# Altium PCB Copy of PCB.PcbDoc
Units mm, origin at the board's own origin, x right, y up, seen from the top; angles counter-clockwise.
Board outline 70 x 50 mm, 2 copper layers (Top Layer, Bottom Layer); 47 components, 41 nets, 168 pads, 0 vias.
Unrouted connection lines stored in the file: 29.
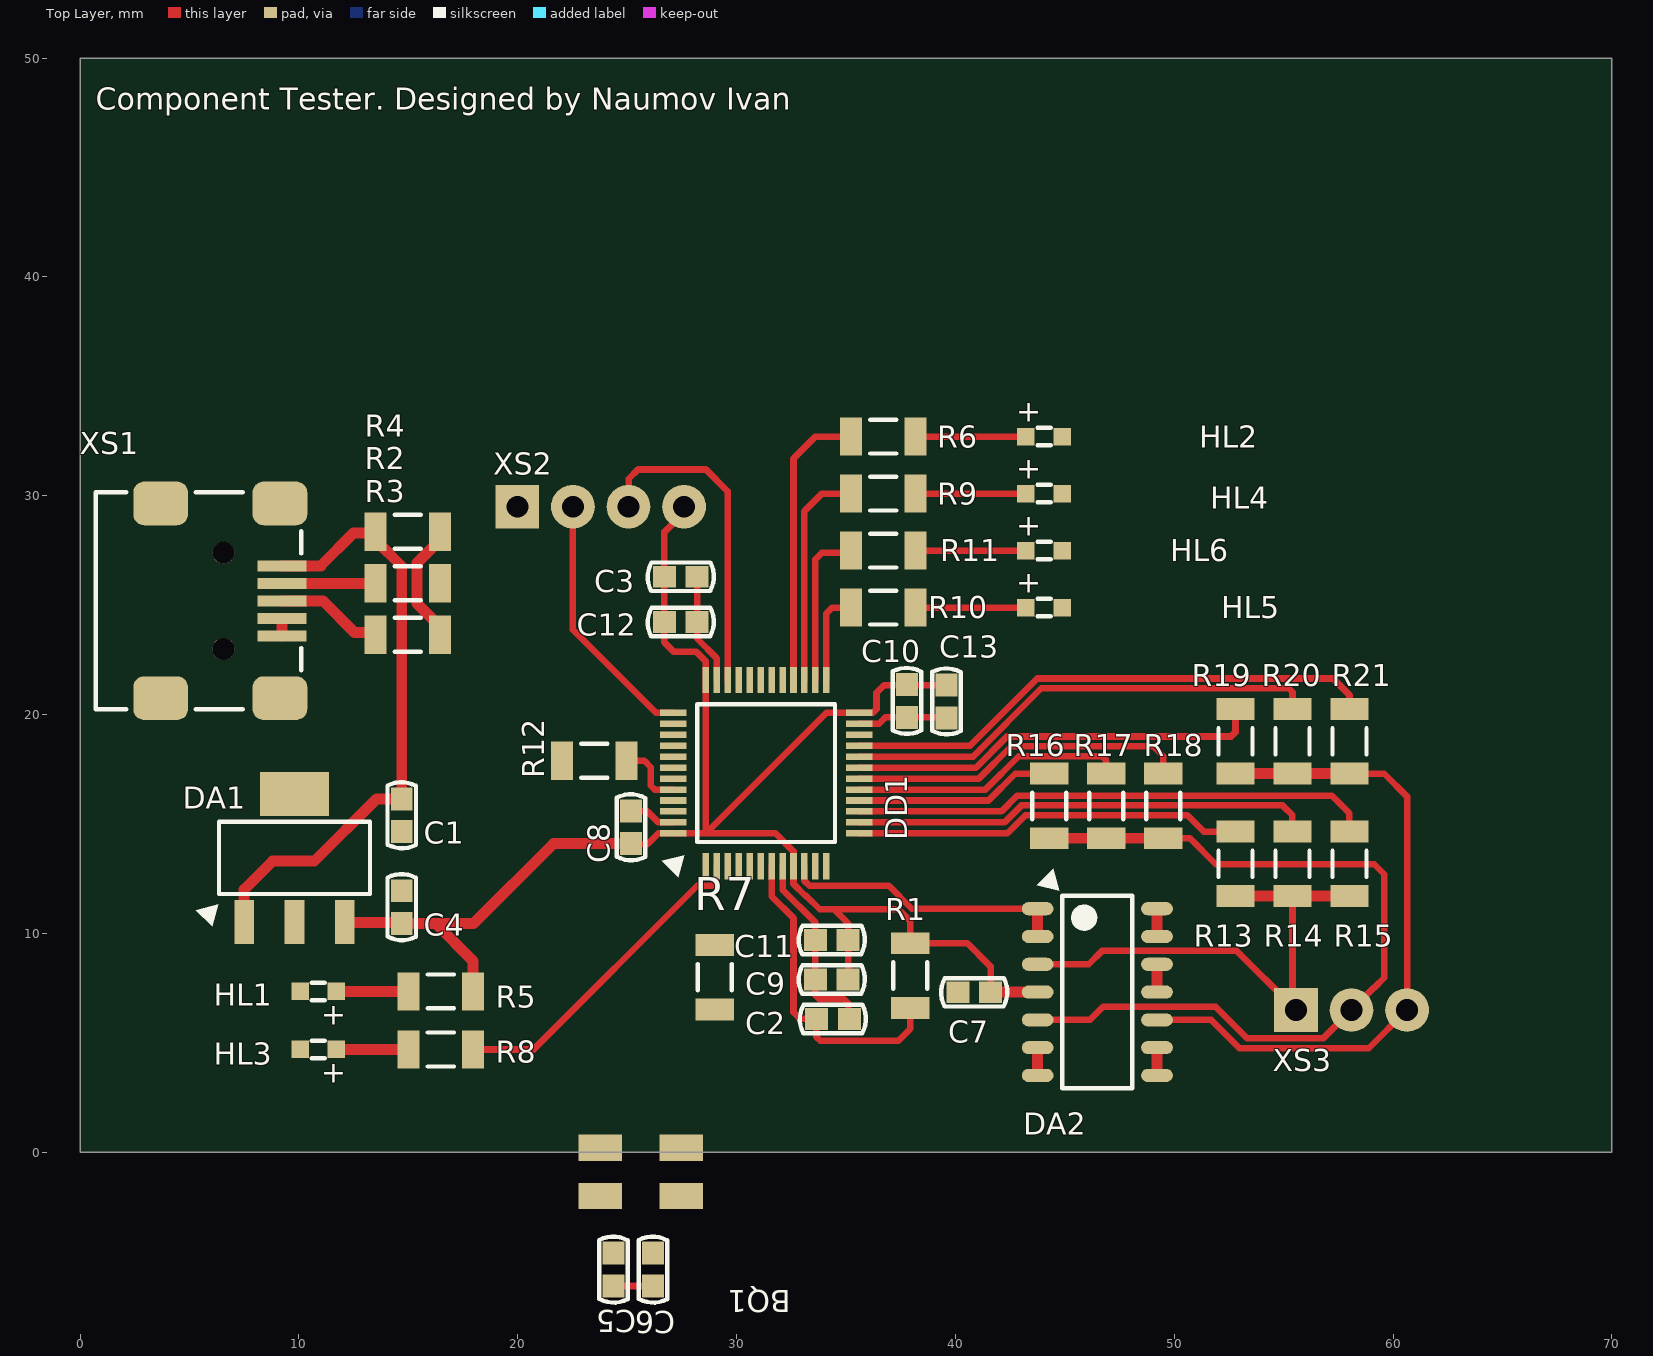
[diagram p0: Top Layer view]
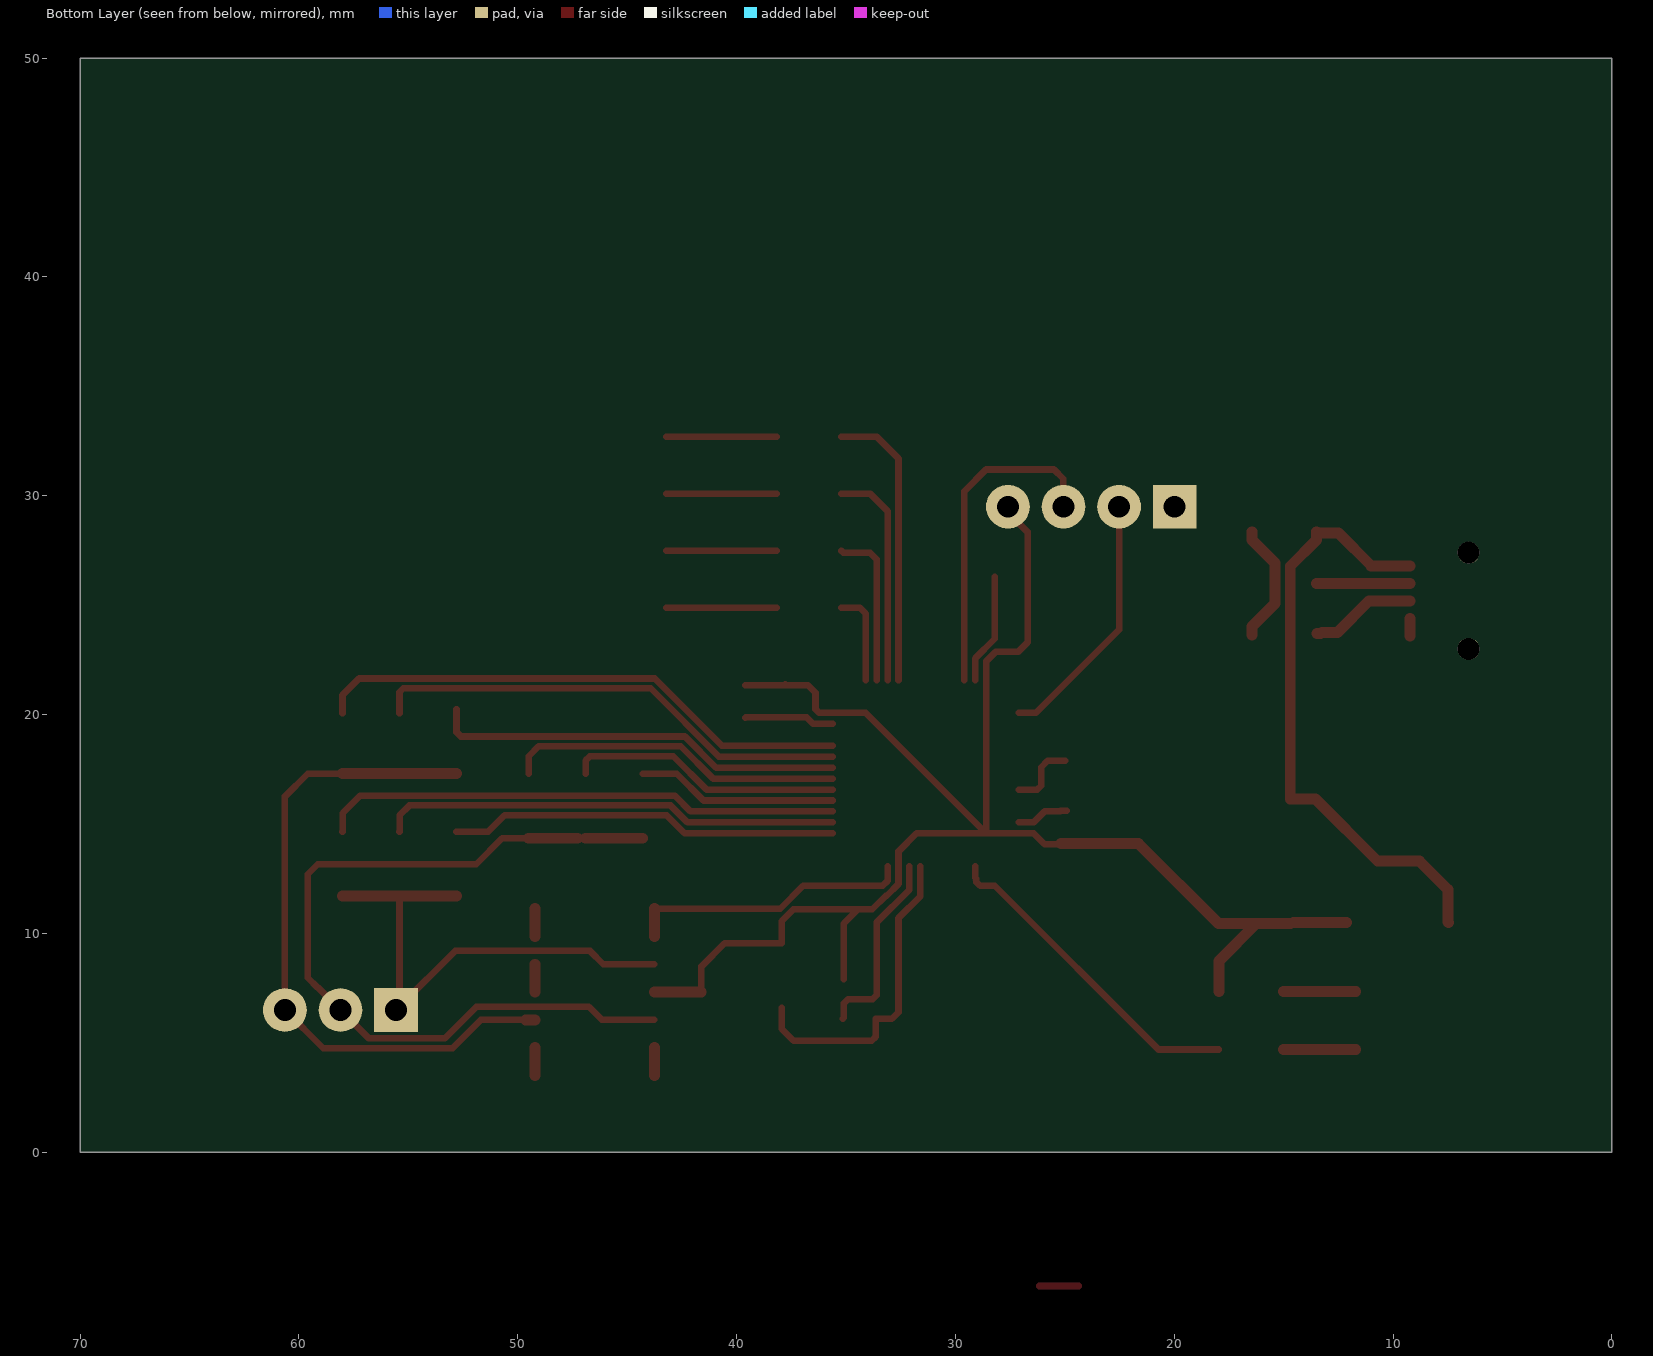
[diagram p1: Bottom Layer view, seen from below]

## Layer stack, top to bottom
Top Solder: solder mask 0.0102, Solder Resist, Dk 3.5
Top Layer: signal copper 0.0356
Dielectric 1: dielectric 0.32, FR-4, Dk 4.8
Bottom Layer: signal copper 0.0356
Bottom Solder: solder mask 0.0102, Solder Resist, Dk 3.5

## Board outline
0,0 70,0 70,50 0,50

## Design rules (kind name [scope] priority, off if disabled: settings)
Clearance [All] p1: gap=0.15 ignorepadtopadclearanceinfootprint=FALSE except(0: Arc-Hole Track-Hole SMDPad-Hole THPad-Hole Via-Hole Fill-Hole Poly-Hole Region-Hole Text-Hole)
PolygonConnect [All] p1: connectstyle=Relief reliefconductorwidth=0.254 reliefentries=4 polygonreliefangle="90 Angle" airgapwidth=0.254
RoutingVias [All] p1: holewidth=0.711 width=1.27 viastyle="Through Hole" minholewidth=0.711 minwidth=1.27 maxholewidth=0.711 maxwidth=1.27
SolderMaskExpansion [All] p1: expansion=0.102 istentingtop=FALSE
Width [All] p1: maxlimit=0.5 minlimit=0.18 preferedwidth=0.3 minimp=50.000000 maximp=50.000000 favimp=50.000000
30 further rules are at their usual default settings.

## Components (designator, comment, footprint, x,y, rotation, side; value= is the part's Value field where it differs from the comment)
BQ1 "8MHz" "Crystal Resonator" 25.625,-0.9 r0 top
C1 "10мк" "C SMD 0603" 14.7,15.4 r270 top
C2 "1мк" "C SMD 0603" 34.4,6.091 r0 top
C3 "0.1мк" "C SMD 0603" 27.45,26.3 r0 top
C4 "22мк" "C SMD 0603" 14.7,11.2 r90 top
C5 "20п" "C SMD 0603" 24.371,-5.363 r90 top
C6 "20п" "C SMD 0603" 26.175,-5.363 r90 top
C7 "0.1мк" "C SMD 0603" 40.859,7.309 r180 top
C8 "0.1мк" "C SMD 0603" 25.175,14.85 r90 top
C9 "0.1мк" "C SMD 0603" 34.35,7.896 r180 top
C10 "0.1мк" "C SMD 0603" 37.781,20.625 r270 top
C11 "0.1мк" "C SMD 0603" 34.35,9.7 r180 top
C12 "1мк" "C SMD 0603" 27.45,24.225 r0 top
C13 "10мк" "C SMD 0603" 39.6,20.6 r270 top
DA1 "Stabilizer" SOT230P695X180-4N 9.796,13.45 r90 top
DA2 "OpAmp LM358DR [SOIC-14]" SOP127P600X175-14N 46.484,7.32 r0 top
DD1 "STM32F103C8T6 [LQFP-48]" "STM32 [LQFP-48]" 31.35,17.325 r90 top
HL1 "LED" "LED [0603]" 10.881,7.35 r180 top
HL2 "LED" "LED [0603]" 44.048,32.704 r0 top
HL3 "LED" "LED [0603]" 10.881,4.7 r180 top
HL4 "LED" "LED [0603]" 44.048,30.1 r0 top
HL5 "LED" "LED [0603]" 44.048,24.891 r0 top
HL6 "LED" "LED [0603]" 44.048,27.496 r0 top
R1 "10к" R_SMD_1206 37.938,8.075 r270 top
R2 "20" R_SMD_1206 14.975,26 r0 top
R3 "20" R_SMD_1206 14.975,23.646 r0 top
R4 "4,7k" R_SMD_1206 14.975,28.354 r180 top
R5 "510" R_SMD_1206 16.485,7.35 r180 top
R6 "510" R_SMD_1206 36.7,32.704 r0 top
R7 "390" R_SMD_1206 29,8 r90 top
R8 "510" R_SMD_1206 16.485,4.696 r180 top
R9 "510" R_SMD_1206 36.7,30.1 r0 top
R10 "510" R_SMD_1206 36.7,24.891 r0 top
R11 "510" R_SMD_1206 36.7,27.496 r0 top
R12 "10к" R_SMD_1206 23.5,17.888 r0 top
R13 "0" R_SMD_1206 52.8,13.181 r90 top
R14 "680" R_SMD_1206 55.404,13.181 r90 top
R15 "470k" R_SMD_1206 58.009,13.181 r90 top
R16 "0" R_SMD_1206 44.293,15.825 r90 top
R17 "680" R_SMD_1206 46.897,15.825 r90 top
R18 "470k" R_SMD_1206 49.501,15.825 r90 top
R19 "0" R_SMD_1206 52.8,18.775 r90 top
R20 "680" R_SMD_1206 55.404,18.775 r90 top
R21 "470k" R_SMD_1206 58.009,18.775 r90 top
XS1 "USB_B" "USB mini B 10033526-N3212LF" 5.4,25.2 r90 top
XS2 "SWD" PLS-4 19.98,29.5 r0 top
XS3 "XS3" PLS-3 55.56,6.5 r0 top

## Footprints (in the part's own frame and the unit in brackets; to place one, negate y for a bottom-side part, rotate by r counter-clockwise, add the part's x,y. Pads: shape width x height; smd on the part's side, far side on the other; paste and mask are expansions set on the pad)
"C SMD 0603" [mm] "Chip Capacitor, 2-Leads, Body 1,60x0,80mm, IPC Medium Density"
  rect 1.05x1 smd: 1(-0.75,0) 2(0.75,0)
  silkscreen extent -1.51,-0.65 1.51,0.65, body extent -0.88,-0.48 0.87,0.47, height 0.85
"Crystal Resonator" [mm] "SMD 5.0×3.2 mm"
  rect 2x1.2 smd: 1(-1.85,-1.1) 1(-1.85,1.1) 1(1.85,-1.1) 1(1.85,1.1)
  body extent -2.5,-1.6 2.5,1.6, height 1.2
"LED [0603]" [mm]
  rect 0.8x0.8 smd: 1(0.825,0) 2(-0.825,0)
  silkscreen extent -0.3,-0.4 0.3,0.4, body extent -0.8,-0.4 0.8,0.4, height 1.1
PLS-3 [mm]
  rect 2x2 hole 1: 1(0,0)
  round 2 hole 1: 2(2.54,0) 3(5.08,0)
  body extent -1.27,-1.25 6.35,1.25, height 8.65
PLS-4 [mm]
  rect 2x2 hole 1: 1(0,0)
  round 2 hole 1: 2(2.54,0) 3(5.08,0) 4(7.62,0)
  body extent -1.27,-1.25 8.89,1.25, height 8.65
R_SMD_1206 [mm] "Chip Capacitor, 2-Leads, Body 3,10x1,60mm, IPC Medium Density"
  rect 1x1.75 smd: 1(-1.475,0) 2(1.475,0)
  silkscreen extent -0.6,-0.77 0.6,0.77, body extent -1.55,-0.8 1.55,0.8, height 0.55
SOP127P600X175-14N [mm] "SOP, 14-Leads, Body 8,65x3,90mm, Pitch 1,27mm, IPC Medium Density"
  oval 1.45x0.6 smd: 1(-2.725,3.81) 2(-2.725,2.54) 3(-2.725,1.27) 4(-2.725,0) 5(-2.725,-1.27) 6(-2.725,-2.54) 7(-2.725,-3.81) 8(2.725,-3.81) 9(2.725,-2.54) 10(2.725,-1.27) 11(2.725,0) 12(2.725,1.27) 13(2.725,2.54) 14(2.725,3.81)
  silkscreen extent -2.76,-4.4 1.6,5.63, body extent -3,-4.4 3,4.4, height 1.75
SOT230P695X180-4N [mm] "SOT223, 4-Leads, Body 6,65x6,95mm (avg), Pitch 2,30mm, IPC Medium Density"
  rect 2x0.9 smd: 1(-2.925,2.3) 2(-2.925,0) 3(-2.925,-2.3)
  rect 2x3.15 smd: 4(2.925,0)
  silkscreen extent -3.13,-3.45 1.65,4.51, body extent -3.47,-3.42 3.48,3.42, height 1.8
"STM32 [LQFP-48]" [mm]
  rect 1.2x0.3 smd: 1(-4.25,2.75) 2(-4.25,2.25) 3(-4.25,1.75) 4(-4.25,1.25) 5(-4.25,0.75) 6(-4.25,0.25) 7(-4.25,-0.25) 8(-4.25,-0.75) 9(-4.25,-1.25) 10(-4.25,-1.75) 11(-4.25,-2.25) 12(-4.25,-2.75) 25(4.25,-2.75) 26(4.25,-2.25) 27(4.25,-1.75) 28(4.25,-1.25) 29(4.25,-0.75) 30(4.25,-0.25) 31(4.25,0.25) 32(4.25,0.75) 33(4.25,1.25) 34(4.25,1.75) 35(4.25,2.25) 36(4.25,2.75)
  rect 0.3x1.2 smd: 13(-2.75,-4.25) 14(-2.25,-4.25) 15(-1.75,-4.25) 16(-1.25,-4.25) 17(-0.75,-4.25) 18(-0.25,-4.25) 19(0.25,-4.25) 20(0.75,-4.25) 21(1.25,-4.25) 22(1.75,-4.25) 23(2.25,-4.25) 24(2.75,-4.25) 37(2.75,4.25) 38(2.25,4.25) 39(1.75,4.25) 40(1.25,4.25) 41(0.75,4.25) 42(0.25,4.25) 43(-0.25,4.25) 44(-0.75,4.25) 45(-1.25,4.25) 46(-1.75,4.25) 47(-2.25,4.25) 48(-2.75,4.25)
  silkscreen extent -4.76,-3.15 3.15,4.76, body extent -4.5,-4.5 4.5,4.5, height 1.6
"USB mini B 10033526-N3212LF" [mm] "USB 2.0 Type B Mini"
  rect 0.5x2.25 smd: 1(1.6,-3.826) 2(0.8,-3.826) 3(0,-3.826) 4(-0.8,-3.826) 5(-1.6,-3.826)
  round 1 hole 1 unplated: M(-2.2,-1.151) M(2.2,-1.151)
  rrect50% 2x2.5 smd: S(-4.45,-3.731) S(-4.45,1.719) S(4.45,-3.731) S(4.45,1.719)
  silkscreen extent -4.95,-4.71 4.95,4.69, body extent -4.95,-4.7 4.95,4.7, height 4.01

## Part data
BQ1: library part "Quartz resonator"
C1 C2 C3 C4 C5 C6 C7 C8 C9 C10 C11 C12 C13: library part C
DD1: "32bit MCU ARM Cortex-M3 72MHz"
R1 R2 R3 R4 R5 R6 R7 R8 R9 R10 R11 R12 R13 R14 R15 R16 R17 R18 R19 R20 R21: library part R
XS1: library part USB
XS2: library part XS_SWD

## Nets (pads, with @x,y where several pads share a name; then routed paths per layer and width w, separated by ;. In a path a pad name is that pad's centre, name@x,y a point inside that pad or via, vN(x,y) a via of type N, cw(c..) or ccw(c..) an arc to the next point about the centre after c; other vN are vias at no path point)
+3.3: C3.1 C4.1 C7.1 C8.1 C9.1 C10.1 C11.1 C12.1 C13.1 DA1.3 DA2.4 DD1.9 DD1.24 DD1.36 DD1.48 R1.1 R5.1 XS2.4 | length 76.6
  Top Layer w0.3: DA1.3 DA1.3@12.121,10.5 ; C8.1 25.2,14.075 25.926,14.075 26.426,14.575 DD1.48 28.6,14.575 ; XS2.4 27.6,29.249 26.7,28.349 C3.1 C12.1 26.7,23.3 27.137,22.863 28.163,22.863 28.6,22.425 DD1.36 28.6,14.575 ; C9.1 C11.1 35.1,10.45 34.45,11.1 ; C13.1 37.806,21.35 C10.1 37.756,21.35 36.75,21.35 36.394,20.994 36.394,20.251 36.219,20.075 DD1.24 34.1,20.075 28.6,14.575 ; C7.1 41.609,8.491 40.55,9.55 R1.1 37.938,10.562 37.4,11.1 34.45,11.1 ; 28.6,14.575 31.774,14.575 32.6,13.749 32.6,12.264 33.139,11.725 33.175,11.725 33.8,11.1 34.45,11.1
  Top Layer w0.5: DA1.3@12.121,10.5 C4.1@14.55,10.5 ; C4.1 16.25,10.45 ; R5.1 17.96,8.74 16.25,10.45 ; C8.1 21.625,14.1 17.975,10.45 16.25,10.45 ; C7.1@41.615,7.315 43.754,7.315 DA2.4
+5: C1.1 DA1.1 R4.2 XS1.1 | length 27.9
  Top Layer w0.5: DA1.1@7.471,10.5 DA1.1 7.5,10.529 7.5,12 8.8,13.3 10.7,13.3 13.55,16.15 C1.1 14.7,26.779 13.5,27.979 R4.2 ; XS1.1 11,26.8 12.5,28.3 R4.2@13.371,28.3
ADC1: DA2.1 DA2.2 DD1.10 | length 13.1
  Top Layer w0.3: DD1.10 33.1,12.401 33.326,12.175 36.961,12.175 38.006,11.13 DA2.1
  Top Layer w0.5: DA2.2 DA2.1
ADC2: DA2.6 DA2.7 DD1.11 | length 1.3
  Top Layer w0.5: DA2.7 DA2.6
ADC3: DA2.8 DA2.9 DD1.12 | length 1.3
  Top Layer w0.5: DA2.8 DA2.9
GND: C1.2 C2.2 C3.2 C4.2 C5.1 C6.1 C7.2 C8.2 C9.2 C10.2 C11.2 C12.2 C13.2 DA1.2 DA2.11 DA2.12 DD1.8 DD1.23 DD1.35 DD1.47 HL1.1 HL2.1 HL3.1 HL4.1 HL5.1 HL6.1 R12.1 XS1.4 XS1.5 XS2.1 | length 24.4
  Top Layer w0.3: C5.1 C6.1 ; C8.2@24.906,15.6 C8.2 25.2,15.575 25.926,15.575 26.426,15.075 DD1.47 ; C3.2 C12.2 28.2,23.461 29.1,22.561 DD1.35 ; DD1.8 32.1,12 33.6,10.5 C9.2 33.6,7.176 33.776,7 34.9,7 35.1,6.8 35.1,6.141 C2.2 ; DD1.23 36.5,19.575 36.8,19.875 C10.2 39.575,19.875 C13.2
  Top Layer w0.5: XS1.5 XS1.4 ; DA2.11 DA2.12
LED1: DD1.28 R6.1 | length 13.2
  Top Layer w0.3: DD1.28 32.6,31.7 33.604,32.704 R6.1
LED2: DD1.27 R9.1 | length 10.2
  Top Layer w0.3: DD1.27 33.1,29.3 33.9,30.1 R9.1
LED3: DD1.26 R11.1 | length 7.3
  Top Layer w0.3: DD1.26 33.6,27.1 33.9,27.4 35.129,27.4 R11.1
LED4: DD1.25 R10.1 | length 4.3
  Top Layer w0.3: DD1.25 34.1,24.616 34.376,24.891 R10.1
NetBQ1_2: C6.2 R7.1
NetDA2_13: DA2.13 DA2.14 | length 1.3
  Top Layer w0.5: DA2.13 DA2.14
NetDD1_44: DD1.44 R12.2 | length 3.2
  Top Layer w0.3: R12.2 25.787,17.888 26.081,17.594 26.081,16.751 26.257,16.575 DD1.44
NetHL1_2: HL1.2 R5.2 | length 3.3
  Top Layer w0.5: HL1.2 R5.2
NetHL2_2: HL2.2 R6.2 | length 5
  Top Layer w0.3: R6.2 HL2.2
NetHL3_2: HL3.2 R8.2 | length 5
  Top Layer w0.5: HL3.2 15.006,4.7 R8.2 13.306,4.696
NetHL4_2: HL4.2 R9.2 | length 5
  Top Layer w0.3: R9.2 HL4.2
NetHL5_2: HL5.2 R10.2 | length 5
  Top Layer w0.3: R10.2 HL5.2
NetHL6_2: HL6.2 R11.2 | length 5
  Top Layer w0.3: R11.2 HL6.2
NetR2_1: R2.1 XS1.2 | length 4.3
  Top Layer w0.5: XS1.2 10.101,26 R2.1
NetR3_1: R3.1 XS1.3 | length 4.9
  Top Layer w0.5: XS1.3 11.1,25.2 12.543,23.757 13.25,23.757 13.311,23.696 R3.1@13.475,23.696
NRST: C2.1 DD1.7 R1.2 | length 14.6
  Top Layer w0.3: DD1.7 31.6,11.7 32.6,10.7 32.6,6.4 32.9,6.1 33.641,6.1 C2.1 33.65,5.271 33.826,5.096 37.396,5.096 37.938,5.638 R1.2
OSCIN: BQ1.1 C5.2 DD1.5
OSCOUT: DD1.6 R7.2
PA3: DD1.13 R13.2 | length 17.9
  Top Layer w0.3: DD1.13 42.375,14.575 43.2,15.4 50.6,15.4 51.344,14.656 R13.2
PA4: DD1.14 R14.2 | length 21.1
  Top Layer w0.3: DD1.14 42.239,15.075 43.014,15.85 54.95,15.85 55.4,15.4 55.4,14.66 R14.2
PA5: DD1.15 R15.2 | length 23.9
  Top Layer w0.3: DD1.15 42.102,15.575 42.827,16.3 57.2,16.3 58,15.5 58,14.664 R15.2
PA6: DD1.16 R16.2 | length 9.2
  Top Layer w0.3: DD1.16 41.509,16.075 42.734,17.3 R16.2
PA7: DD1.17 R17.2 | length 12.6
  Top Layer w0.3: DD1.17 41.372,16.575 42.897,18.1 46.7,18.1 46.9,17.9 46.9,17.303 R17.2
PA11: DD1.32 R2.2
PA12: DD1.33 R3.2 R4.1 | length 5.6
  Top Layer w0.5: R3.2 16.45,24.021 15.4,25.071 15.4,26.929 16.45,27.979 R4.1
PB0: DD1.18 R18.2 | length 15.5
  Top Layer w0.3: DD1.18 41.075,17.075 42.55,18.55 49.05,18.55 49.501,18.099 R18.2
PB1: DD1.19 R19.2 | length 18.9
  Top Layer w0.3: DD1.19 40.939,17.575 42.364,19 52.6,19 52.8,19.2 R19.2
PB2: DD1.20 R20.2 | length 22.1
  Top Layer w0.3: DD1.20 40.802,18.075 43.927,21.2 55.229,21.2 55.404,21.024 R20.2@55.404,20.06
PB10: DD1.21 R21.2 | length 24.8
  Top Layer w0.3: DD1.21 40.666,18.575 43.741,21.65 57.25,21.65 58.009,20.891 R21.2@58.009,20.06
PC13: DD1.2 R8.1 | length 15
  Top Layer w0.3: R8.1 20.721,4.696 28.2,12.175 28.874,12.175 29.05,12.351 29.05,12.487 29.1,12.537 DD1.2
SWCLK: DD1.37 XS2.2 | length 11.8
  Top Layer w0.3: XS2.2 22.52,23.88 26.325,20.075 DD1.37
SWIO: DD1.34 XS2.3 | length 15
  Top Layer w0.3: XS2.3 25.074,29.514 25.074,30.774 25.5,31.2 28.6,31.2 29.6,30.2 DD1.34
"Вход A": DA2.3 R13.1 R14.1 R15.1 XS3.1 | length 23.4
  Top Layer w0.3: DA2.3 46.09,8.59 46.7,9.2 52.86,9.2 XS3.1@55.404,6.656 ; R14.1 XS3.1@55.404,6.656 ; XS3.1 XS3.1@55.404,6.656
  Top Layer w0.5: R13.1 R14.1 R15.1
"Вход B": DA2.5 R16.1 R17.1 R18.1 XS3.2 | length 38.6
  Top Layer w0.3: DA2.5 46.15,6.05 46.75,6.65 51.885,6.65 53.335,5.2 56.8,5.2 XS3.2 59.125,7.525 59.15,7.525 59.6,7.976 59.6,12.7 59.135,13.165 51.9,13.165 50.715,14.35 R18.1 ; R17.1 R17.1@47.272,14.35
  Top Layer w0.5: R16.1 R17.1 ; R17.1@47.272,14.35 R18.1
"Вход C": DA2.10 R19.1 R20.1 R21.1 XS3.3 | length 30.7
  Top Layer w0.3: DA2.10@49.634,6.05 51.68,6.05 52.98,4.75 58.89,4.75 XS3.3 60.64,16.26 59.6,17.3 R21.1
  Top Layer w0.5: DA2.10 DA2.10@49.634,6.05 ; R19.1 R20.1 R21.1
pads on no net: DA1.4 DD1.1 DD1.3 DD1.4 DD1.22 DD1.29 DD1.30 DD1.31 DD1.38 DD1.39 DD1.40 DD1.41 DD1.42 DD1.43 DD1.45 DD1.46 XS1.M XS1.S

## Silkscreen, mask and mechanical layers (free items; w line width, h text height)
Top Overlay:
  text "Component Tester. Designed by Naumov Ivan" at 0.725,47.642 h1

## Text inside footprints (layer, text, board x,y; h text height)
HL1: Top Overlay "+" at 12.156,6.667 h1 r180
HL2: Top Overlay "+" at 42.773,33.388 h1
HL3: Top Overlay "+" at 12.156,4.017 h1 r180
HL4: Top Overlay "+" at 42.773,30.783 h1
HL5: Top Overlay "+" at 42.773,25.575 h1
HL6: Top Overlay "+" at 42.773,28.179 h1